# Altium PCB U2S_HVPP_OLD.PcbDoc
Units mil, origin at the board's own origin, x right, y up, seen from the top; angles counter-clockwise.
Board outline 4000 x 4000 mil, 2 copper layers (Top Layer, Bottom Layer); 18 components, 31 nets, 78 pads, 0 vias.
Unrouted connection lines stored in the file: 45.
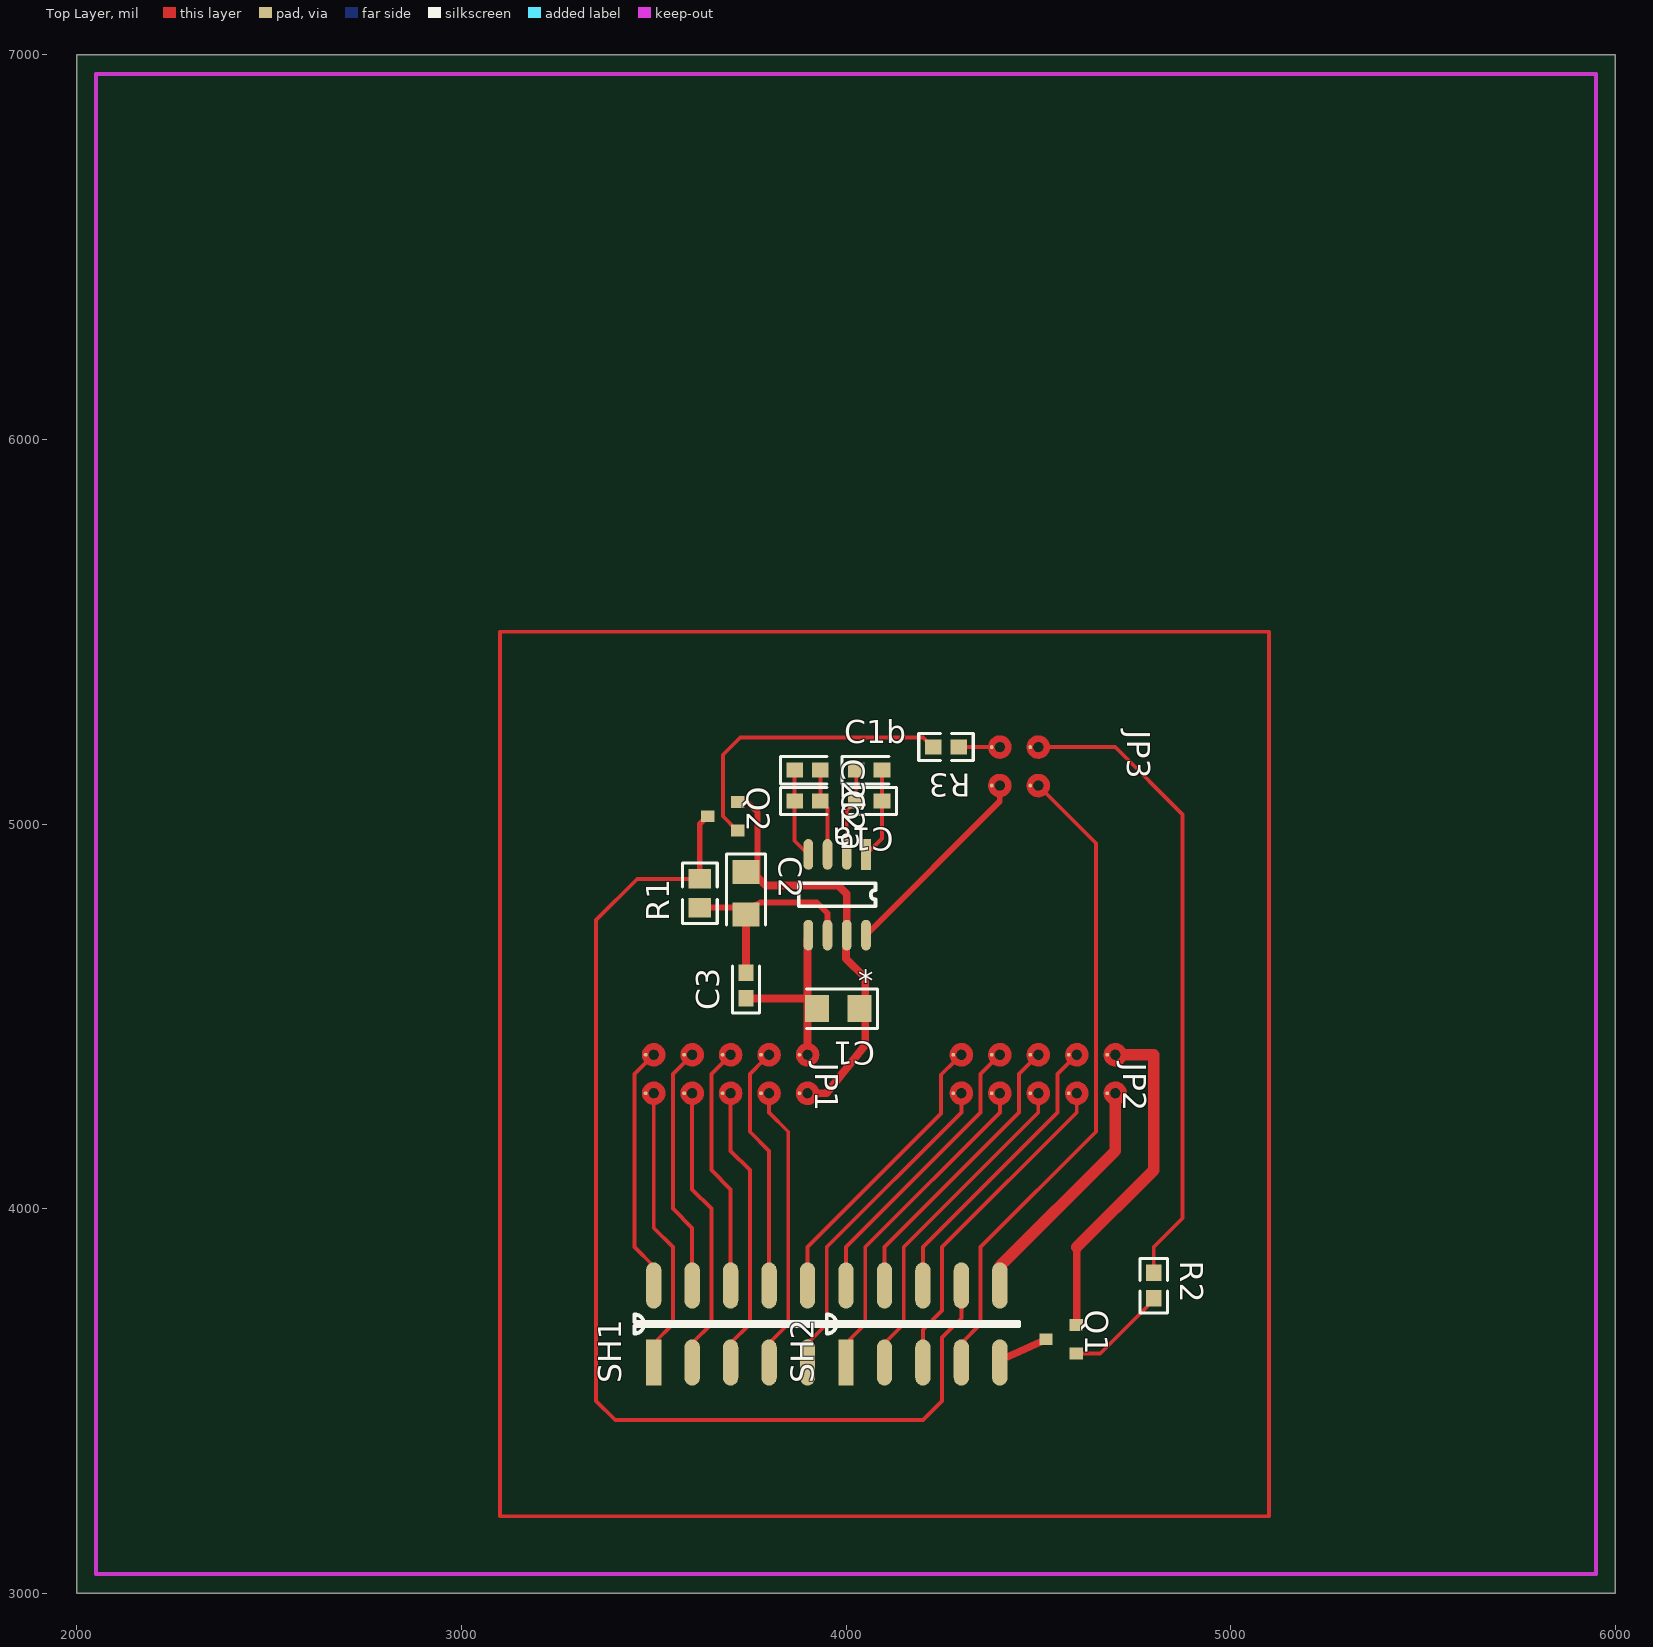
[diagram p0: Top Layer view]
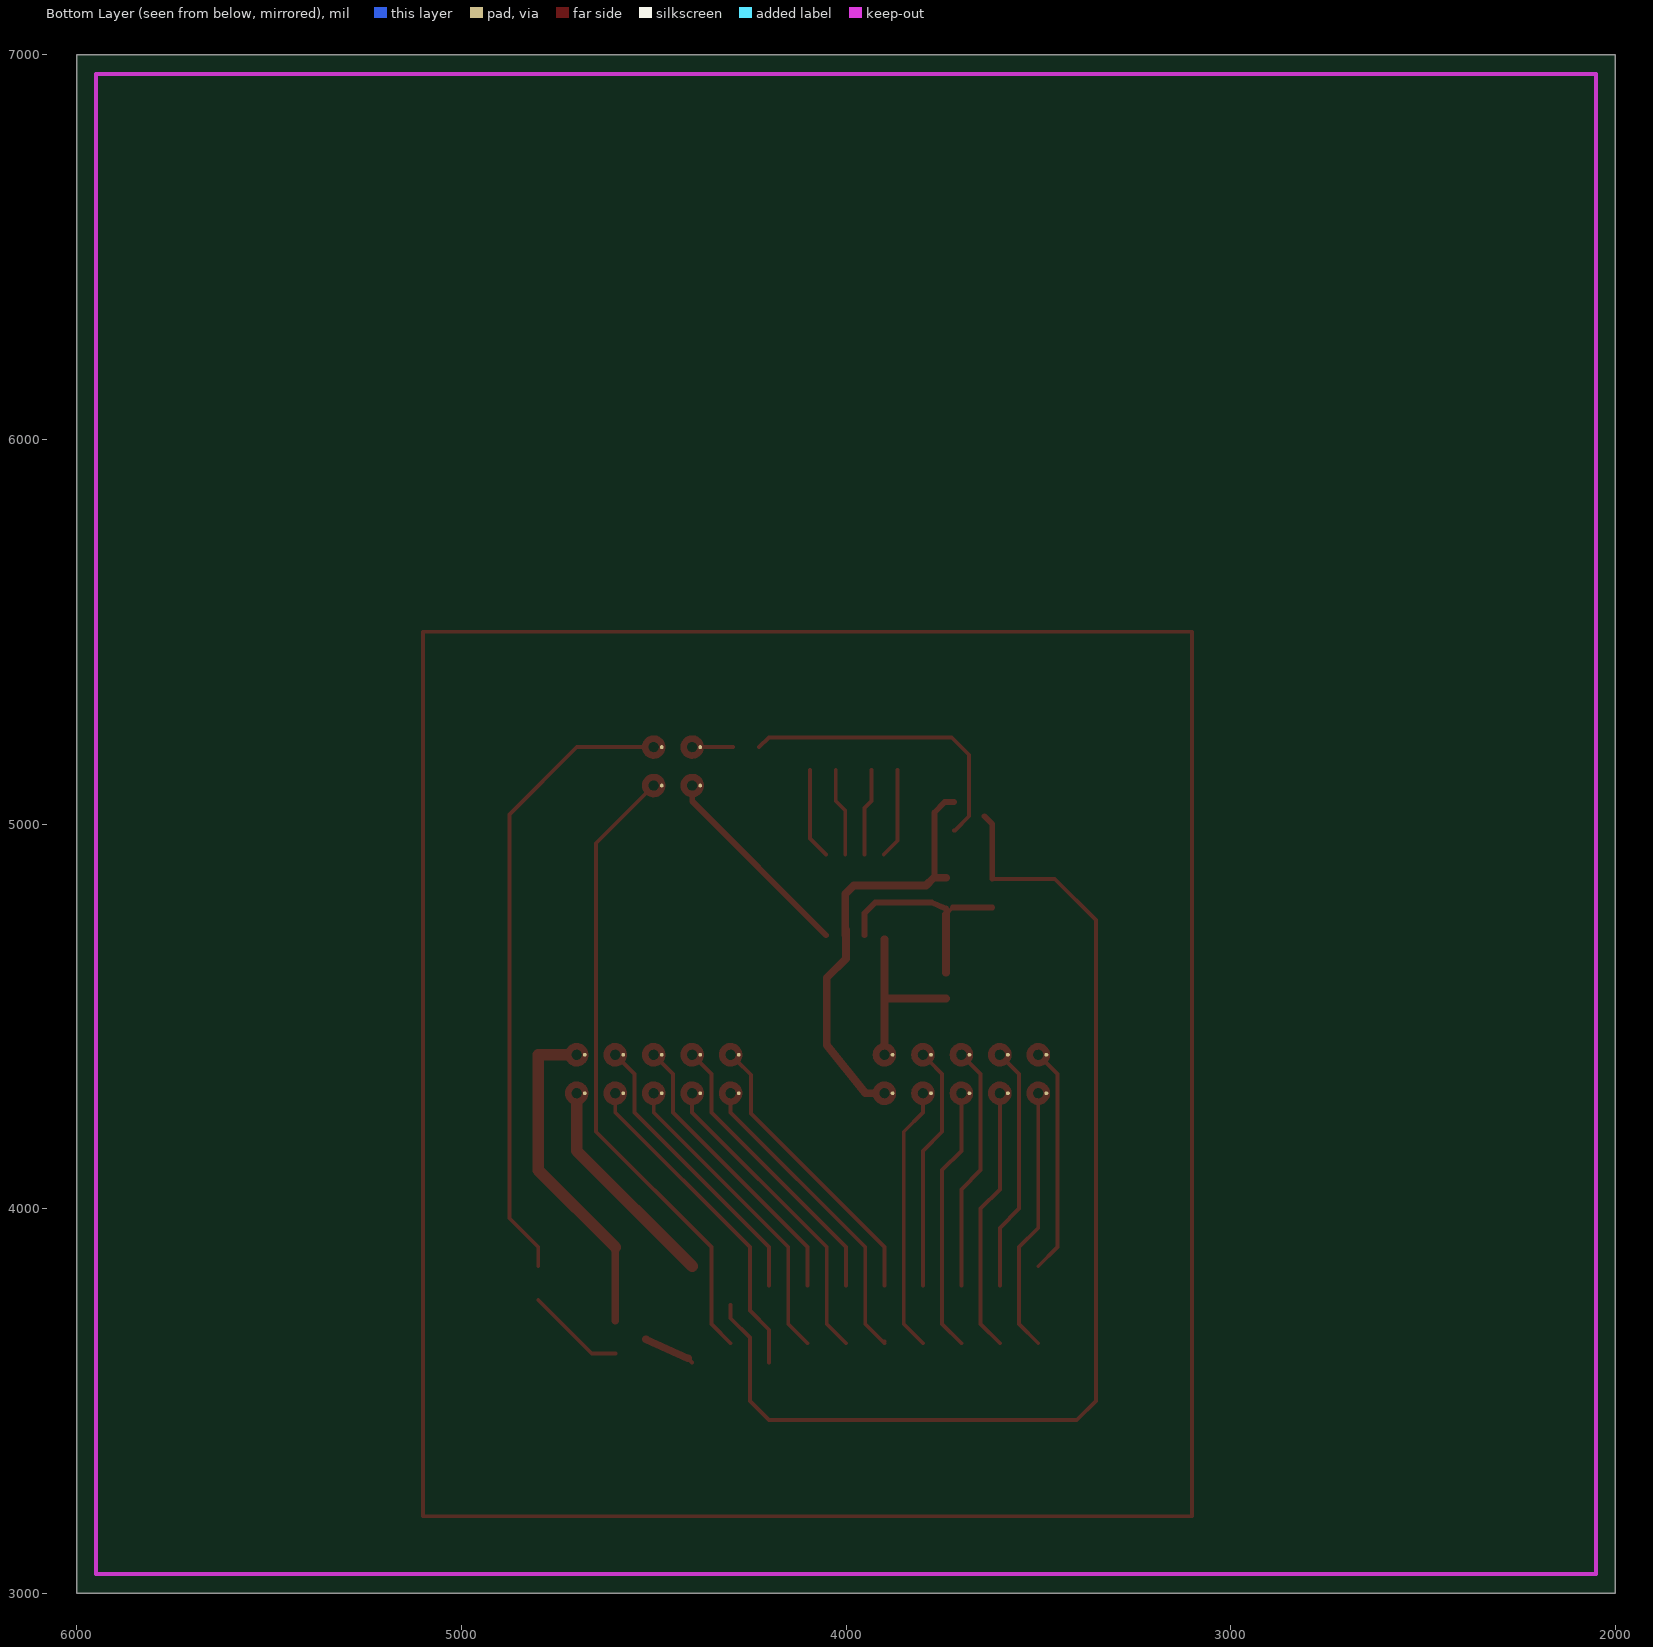
[diagram p1: Bottom Layer view, seen from below]

## Layer stack, top to bottom
Top Layer: signal copper 1.4
Dielectric: dielectric 12.6, FR-4, Dk 4.8
Bottom Layer: signal copper 1.4

## Board outline
2000,3000 6000,3000 6000,7000 2000,7000

## Design rules (kind name [scope] priority, off if disabled: settings)
Clearance [All] p1: gap=5
ComponentClearance [All] p1: gap=10 collisioncheckmode=0
PolygonConnect [All] p1: connectstyle=Relief reliefconductorwidth=10 reliefentries=4 polygonreliefangle="90 Angle"
RoutingLayers [All] p1: top layer=Horizontal bottom layer=Vertical
RoutingVias [All] p1: holewidth=28 width=50 viastyle="Through Hole" minholewidth=28 minwidth=50 maxholewidth=28 maxwidth=50
SolderMaskExpansion [All] p1: expansion=4
TestPointUsage [All] p1: valid=0 allowmultiple=FALSE
Testpoint [All] p1: side=15 testpointundercomponent=TRUE minsize=40 maxsize=100 preferedsize=60 minholesize=0 maxholesize=40 preferedholesize=32 testpointgrid=1 style=1023 order=-539222988
Width [All] p1: maxlimit=10 minlimit=10 preferedwidth=10
16 further rules are at their usual default settings.

## Classes and differential pairs
component class U2S_HVPP: * C1 C1a C1b C2 C2a C2b C3 JP1 JP2 JP3 Q1 Q2 R1 R2 R3 SH1

## Components (designator, comment, footprint, x,y, rotation, side; value= is the part's Value field where it differs from the comment)
* "ST662" SO8 4052,4921 r270 top
C1 "Cap Semi" CC3216-1206 3980,4520 r180 top
C1a "Cap Semi" CC1608-0603 4060,5060 r180 top
C1b "Cap Semi" CC1608-0603 4060,5140 r0 top
C2 "Cap Semi" CC3216-1206 3740,4820 r270 top
C2a "Cap Semi" CC1608-0603 3900,5060 r0 top
C2b "Cap Semi" CC1608-0603 3900,5140 r0 top
C3 "Cap Semi" CC1608-0603 3740,4580 r90 top
JP1 "Header 5X2" H2x5 3600,4300 r0 top
JP2 "Header 5X2" H2x5 4400,4300 r0 top
JP3 "Header 2X2" H2x2 4500,5100 r0 top
Q1 "PNP" SOT23 4520,3660 r270 top
Q2 "QNPN" SOT23 3640,5020 r270 top
R1 "1k5" R2012-0805 3620,4820 r90 top
R2 "Res3" C1608-0603 4800,3800 r270 top
R3 "Res3" C1608-0603 4260,5200 r180 top
SH1 "*" SH10 3500,3600 r90 top
SH2 "*" SH10 4000,3600 r90 top

## Footprints (in the part's own frame and the unit in brackets; to place one, negate y for a bottom-side part, rotate by r counter-clockwise, add the part's x,y. Pads: shape width x height; smd on the part's side, far side on the other; paste and mask are expansions set on the pad)
C1608-0603 [mm]
  rect 1.1x1 smd: 1(-0.85,0) 2(0.85,0)
  silkscreen extent -1.8,-0.9 1.8,0.9
CC1608-0603 [mm]
  rect 1.1x1 smd: 1(-0.85,0) 2(0.85,0)
  silkscreen extent -1.8,-0.9 1.3,0.9
CC3216-1206 [mm]
  rect 1.6x1.8 smd: 1(-1.4,0) 2(1.4,0)
  silkscreen extent -2.6,-1.3 2.1,1.3
H2x2 [mil]
  round 10 all layers, no hole: 1(-121,0) 2(-121,100) 3(-21,0) 4(-21,100)
  Top Layer circle w17: c0,100 r22
  Top Layer circle w17: c0,0 r22
  Top Layer circle w17: c-100,100 r22
  Top Layer circle w17: c-100,0 r22
H2x5 [mil]
  round 10 all layers, no hole: 1(-121,0) 2(-121,100) 3(-21,0) 4(-21,100) 5(79,0) 6(79,100) 7(179,0) 8(179,100) 9(279,0) 10(279,100)
  Top Layer circle w17: c-100,0 r22
  Top Layer circle w17: c-100,100 r22
  Top Layer circle w17: c0,0 r22
  Top Layer circle w17: c0,100 r22
  Top Layer circle w17: c100,0 r22
  Top Layer circle w17: c100,100 r22
  Top Layer circle w17: c300,0 r22
  Top Layer circle w17: c300,100 r22
  Top Layer circle w17: c200,100 r22
  Top Layer circle w17: c200,0 r22
R2012-0805 [mm]
  rect 1.3x1.5 smd: 1(-0.95,0) 2(0.95,0)
  silkscreen extent -2,-1.15 2,1.15
SH10 [mil]
  rect 120x40 smd: 1(0,0)
  oval 120x40 smd: 2(200,0) 3(0,-100) 4(200,-100) 5(0,-200) 6(200,-200) 7(0,-300) 8(200,-300) 9(0,-400) 10(200,-400)
  silkscreen extent 75,-450 125,50
SO8 [mil]
  rect 80x25 smd: 1(0,0)
  oval 80x25 smd: 2(0,-50) 3(0,-100) 4(0,-150) 5(210,-150) 6(210,-100) 7(210,-50) 8(210,0)
  silkscreen extent 75,-175 135,25
SOT23 [mil]
  rect 31x35 smd: 1(37,79) 2(-37,79)
  rect 30x35 smd: 3(0,0)

## Part data
C1 C1a C1b C2 C2a C2b C3: "Capacitor (Semiconductor SIM Model)"
JP1 JP2: library part MHDR2X5, "Header, 5-Pin, Dual row"
JP3: "Header, 2-Pin, Dual row"
Q1: "PNP Bipolar Transistor"
Q2: "NPN Bipolar Transistor"
R1: library part "Res Varistor", "Varistor (Voltage-Sensitive Resistor)"
R2 R3: "Resistor"
SH1 SH2: library part 2x5_SMT

## Nets (pads, with @x,y where several pads share a name; then routed paths per layer and width w, separated by ;. In a path a pad name is that pad's centre, name@x,y a point inside that pad or via, vN(x,y) a via of type N, cw(c..) or ccw(c..) an arc to the next point about the centre after c; other vN are vias at no path point)
C0: JP2.1 SH1.9
C1: JP2.2 SH1.10
C2: JP2.3 SH2.1
C3: JP2.4 SH2.2
C4: JP2.5 SH2.3
C5: JP2.6 SH2.4
C6: JP2.7 SH2.5
C7: JP2.8 SH2.6
D0: JP1.1 SH1.1
D1: JP1.2 SH1.2
D2: JP1.3 SH1.3
D3: JP1.4 SH1.4
D4: JP1.5 SH1.5
D5: JP1.6 SH1.6
D6: JP1.7 SH1.7
D7: JP1.8 SH1.8
GND: *.7 C1.1 C2.1 JP1.9 JP2.9 Q2.2 SH2.10
HL: *.8 JP3.1
Net*_1: *.1 C1a.1 C1b.2
Net*_2: *.2 C1a.2 C1b.1
Net*_3: *.3 C2a.2 C2b.2
Net*_4: *.4 C2a.1 C2b.1
Net*_6: *.6 C2.2 C3.2 R1.1
NetJP3_4: JP3.4 R2.1
NetQ1_2: Q1.1 R2.2 | length 259
  Top Layer w10: Q1.1 4661,3623 R2.2@4800,3762.6
NetQ2_2: Q2.1 R3.2
RSA: JP3.2 R3.1
RST: Q2.3 R1.2 SH2.8
VCC: *.5 C1.2 C3.1 JP1.10 JP2.10 Q1.2 | length 275
  Top Layer w20: 3900,4425 *.5@3900,4700
VTG: Q1.3 SH2.9
XT: JP3.3 SH2.7
copper on no net: | length 31799.8
  Top Layer w10: 3485,4385 3450,4350 3450,3900 3500,3850 ; 3500,3650 3550,3700 3550,3900 3500,3950 3500,4280 ; 3585,4385 3550,4350 3550,4000 3600,3950 3600,3800 ; 3600,3650 3650,3700 3650,4000 3600,4050 3600,4280 ; 3620,4857.4 3457.4,4857.4 3350,4750 3350,3500 3400,3450 4200,3450 4250,3500 4250,3665 4300,3715 4300,3750 ; 3685,4385 3650,4350 3650,4100 3700,4050 3700,3800 ; 3700,3650 3750,3700 3750,4100 3700,4150 3700,4280 ; 3719,4983 3717,4983 3680,5020 3680,5180 3725,5225 4200,5225 4226.54,5200 ; 3722.28,4782.6 3740,4764.88 ; 3785,4385 3750,4350 3750,4200 3800,4150 3800,3800 ; 3800,3650 3850,3700 3850,4200 3800,4250 3800,4280 ; 3866.54,5140 3866.54,5060 3866.54,4956.46 3902,4921 ; 3893.46,4546.54 3900,4540 ; 3900,3650 3950,3700 3950,3900 4300,4250 4300,4280 ; 3900,3655 3905,3655 ; 3900,3800 3900,3900 4247,4247 4247,4348 4285,4385 ; 3933.46,5140 3933.46,5060 3952,5041.46 3952,4921 ; 4000,3650 4050,3700 4050,3900 4400,4250 4400,4280 ; 4000,3800 4000,3900 4350,4250 4350,4350 4385,4385 ; 4002,4921 4002,5035.46 4026.54,5060 4026.54,5140 ; 4052,4921 4093.46,4962.46 4093.46,5060 4093.46,5140 ; 4100,3650 4150,3700 4150,3900 4500,4250 4500,4280 ; 4100,3800 4100,3900 4450,4250 4450,4350 4485,4385 ; 4200,3600 4200,3685 4250,3735 4250,3900 4600,4250 4600,4280 ; 4200,3800 4200,3900 4550,4250 4550,4350 4585,4385 ; 4293.46,5200 4370,5200 ; 4300,3650 4350,3700 4350,3900 4650,4200 4650,4950 4520,5080 ; 4400,3600 4410.79,3610.79 ; 4522,5200 4700,5200 4875,5025 4875,3975 4800,3900 4800,3850 ; 3100,3200 5100,3200 5100,5500 3100,5500 3100,3200
  Top Layer w15: 3620,4782.6 3722.28,4782.6 ; 3620,4857.4 3620,5000 3640,5020 ; 3719,5057 3743,5057 3770,5030 3770,4863 ; 3740,4780 3777,4796 3924,4796 3952,4768 3952,4711 ; 4052,4711 4400,5059 4400,5070
  Top Layer w20: 3740,4546.53 3893.47,4546.53 ; 3740,4613.47 3740,4764.88 ; 3740,4860 3772,4860 3792,4840 3980,4840 4002,4818 4002,4711 ; 3930,4300 3950,4300 4050,4425 4050,4600 4000,4650 4000,4725 ; 4410.79,3610.79 4520,3660 ; 4600,3709.21 4600,3900
  Top Layer w30: 4400,3850 4700,4150 4700,4270 ; 4600,3900 4800,4100 4800,4400 4730,4400

## Keep-outs
Keep-Out Layer:
  lines w10: 2050,3050 5950,3050 5950,6950 2050,6950 2050,3050

## Silkscreen, mask and mechanical layers (free items; w line width, h text height)
Drill Drawing:
  text ".LEGEND" at 6200,3200 h60
  text "Drill Drawing." at 6200,3100 h60

## Dimensions
2050,3050 to 5950,3050 on Mechanical 1
2050,3050 to 2050,6950 on Mechanical 1